# Altium PCB EE209_PCB.PcbDoc
Units mm, origin at the board's own origin, x right, y up, seen from the top; angles counter-clockwise.
Board outline 128.78 x 111.25 mm, 2 copper layers (Top Layer, Bottom Layer); 43 components, 38 nets, 164 pads, 0 vias.
Unrouted connection lines stored in the file: 29.
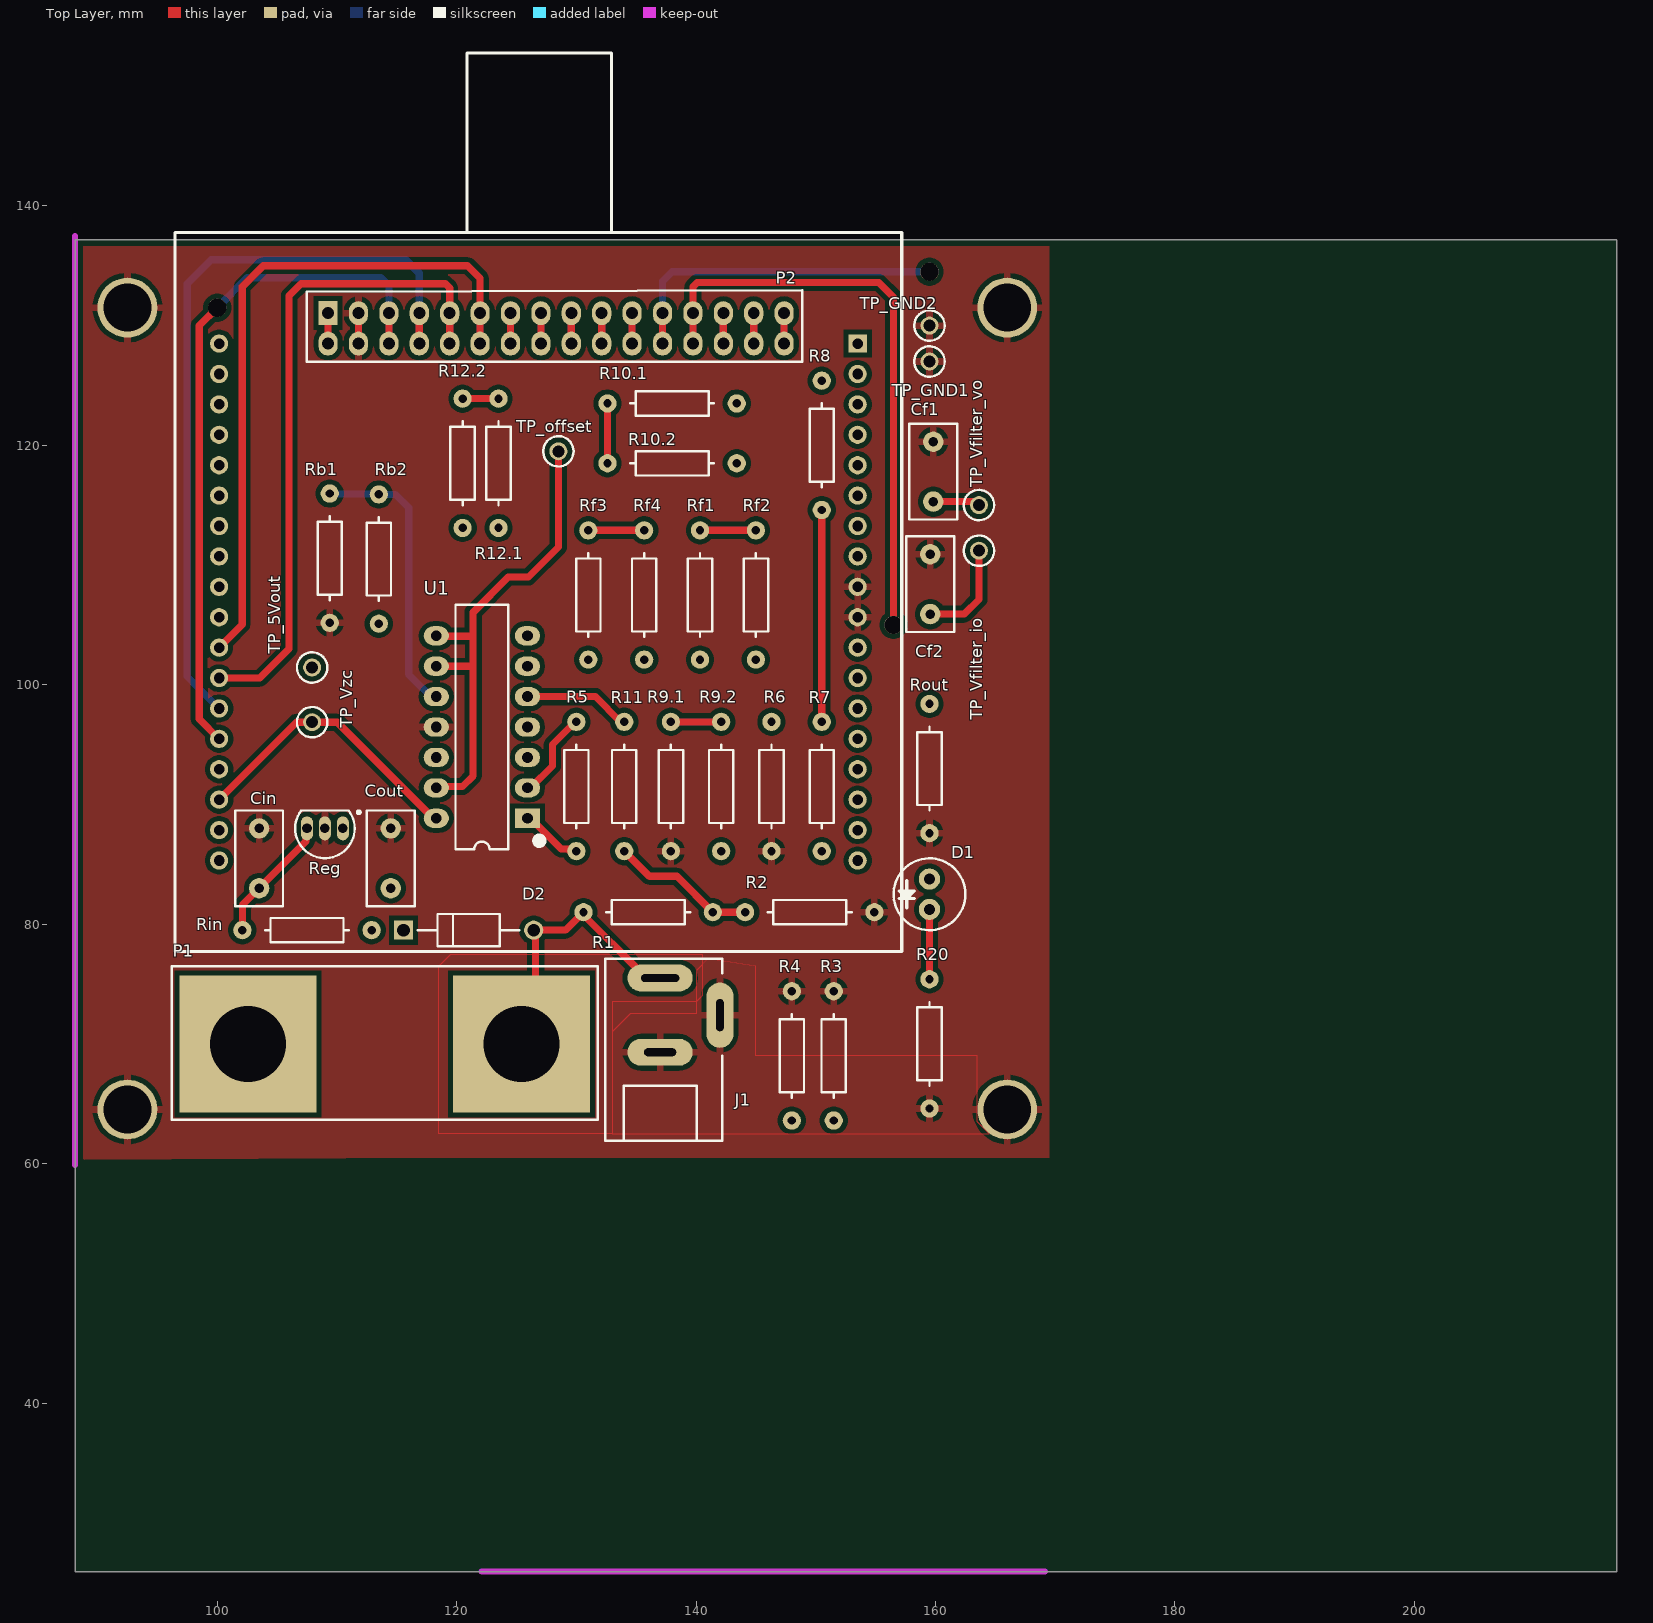
[diagram p0: Top Layer view]
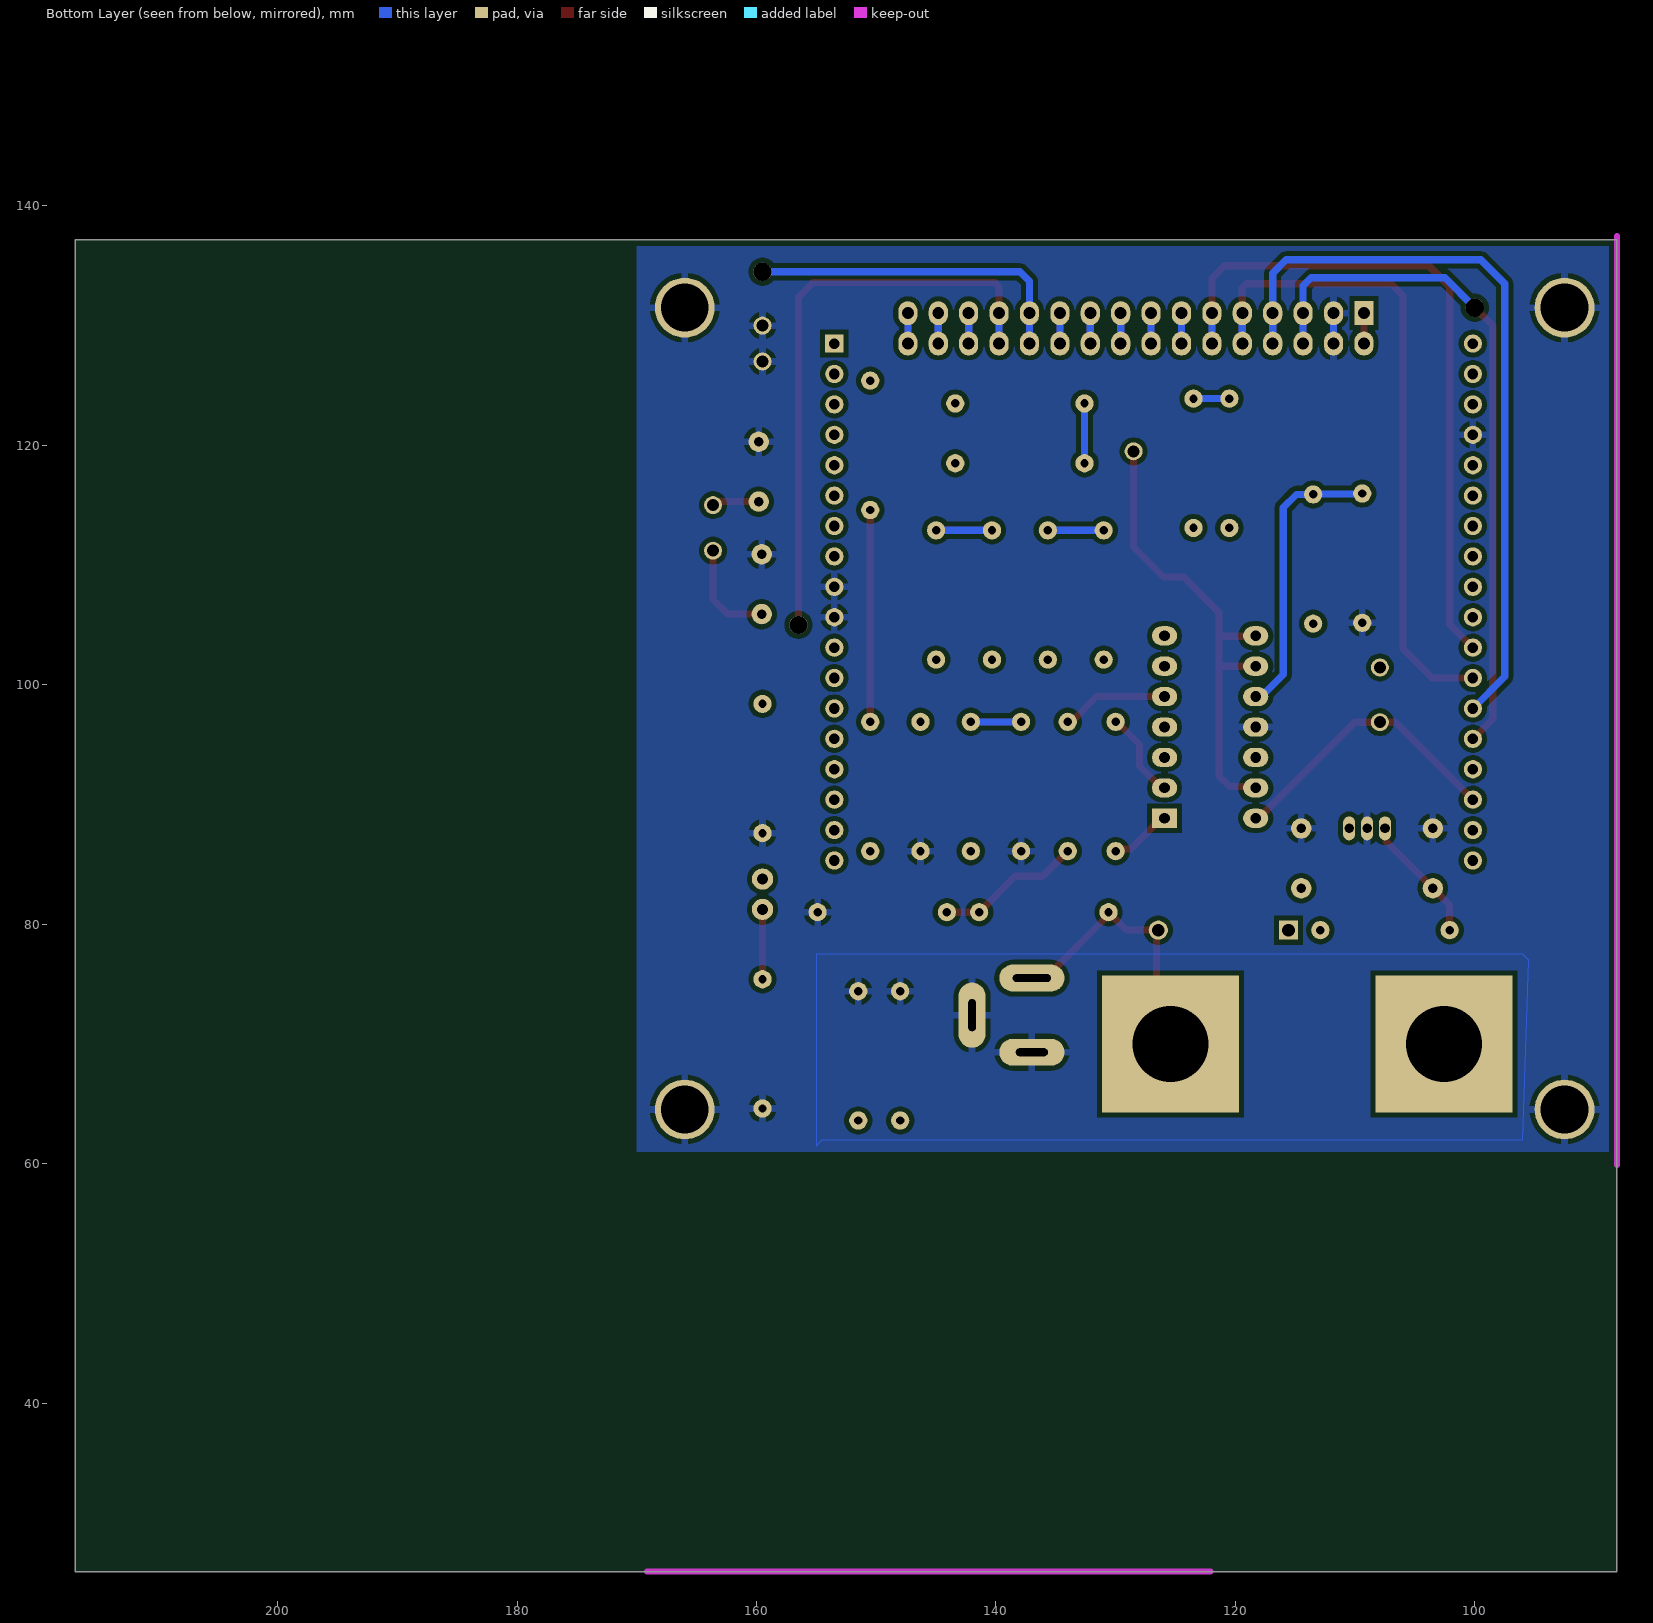
[diagram p1: Bottom Layer view, seen from below]
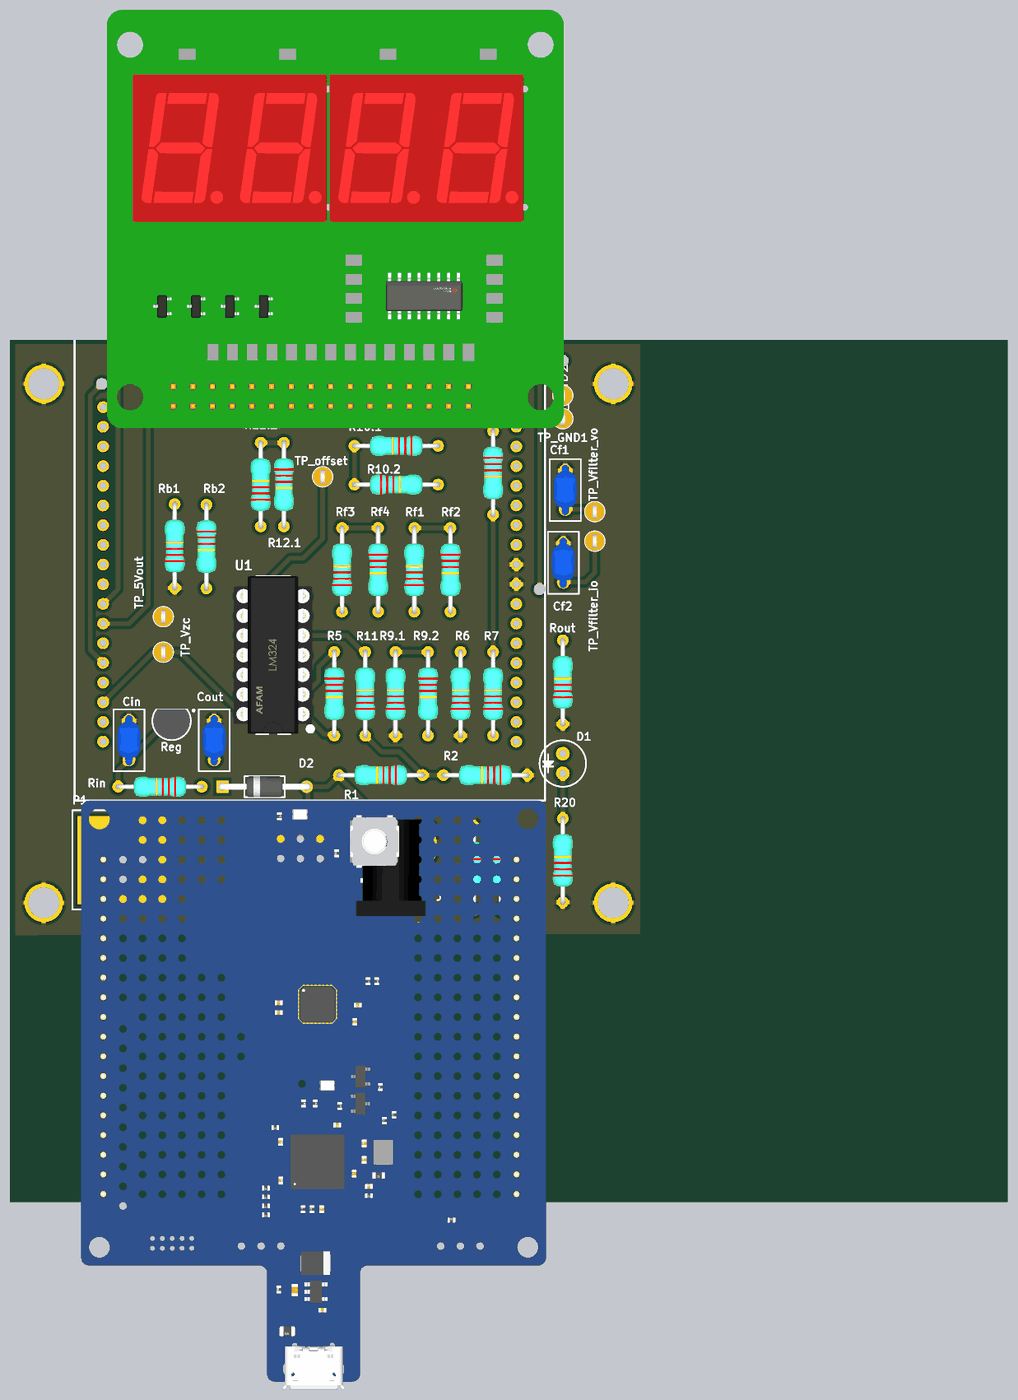
[diagram p2: 3D render of the assembled board from above, using the file's embedded part models]

## Layer stack, top to bottom
Top Solder: solder mask 0.0102, Solder Resist, Dk 3.5
Top Layer: signal copper 0.0356
Dielectric 1: dielectric 0.32, FR-4, Dk 4.8
Bottom Layer: signal copper 0.0356
Bottom Solder: solder mask 0.0102, Solder Resist, Dk 3.5

## Board outline
88.138,25.908 88.138,137.16 216.916,137.16 216.916,25.908

## Design rules (kind name [scope] priority, off if disabled: settings)
BoardOutlineClearance [All] p1: gap=0.5 ignorepadtopadclearanceinfootprint=FALSE
Clearance [All] p1: gap=0.4 ignorepadtopadclearanceinfootprint=FALSE
Height [All] p1: minheight=0 maxheight=20 prefheight=12.7
HoleSize [All] p1: absolutevalues=TRUE maxlimit=10 minlimit=0.4 maxpercent=80.000 minpercent=20.000
MinimumAnnularRing [All] p1: minimumring=0.076
MinimumSolderMaskSliver [All] p1: minsoldermaskwidth=0.1
PlaneConnect [All] p1: planeconnectstyle=Relief reliefexpansion=0.6 reliefentries=4 reliefconductorwidth=0.6 reliefairgap=0.4
PolygonConnect PolygonConnect_1 [All] p1: connectstyle=Relief reliefconductorwidth=0.6 reliefentries=4 polygonreliefangle="90 Angle" airgapwidth=0.4
RoomDefinition EE209_Schematic [InComponentClass('EE209_Schematic')] p1: confinementstyle=ConfineIn formatcopy=TRUE lockcomponents=FALSE outline 170.18,27.686 439.42,27.686 439.42,106.934 170.18,106.934
RoutingVias [All] p1: holewidth=0.6 width=1 viastyle="Through Hole" minholewidth=0.5 minwidth=0.8 maxholewidth=1 maxwidth=2
SMDToCorner [All] p1: distance=157480
SilkToSilkClearance [All] p1: silktosilkclearance=0.1
SilkToSolderMaskClearance [IsPad] p1: minsilkscreentomaskgap=0.1 clearancetoexposedcopper=TRUE
SolderMaskExpansion [All] p1: expansion=0.102 istentingtop=FALSE
Width [All] p1: maxlimit=10 minlimit=0.4 preferedwidth=0.6
24 further rules are at their usual default settings.

## Classes and differential pairs
component class EE209_Schematic: Cf2 Cin1 Cout1 D2 J1 P1 R1 R5 R7 R9 R10 R11 R12 R13 R14 R15 R16 Rb1 Rb2 Reg1 Rf3 Rf4 Rin1 Rout1 TP_1 TP_GND1 TP_GND2 TP_offset1 TP_Vfilter_io1 TP_Vzc1 U1

## Components (designator, comment, footprint, x,y, rotation, side; value= is the part's Value field where it differs from the comment)
Cf1 "1n" CCAP-5P0 159.822,117.802 r90 top
Cf2 "1n" CCAP-5P0 159.568,108.404 r90 top
Cin "47micro" CCAP-5P0 103.5,85.5 r90 top
Cout "10micro" CCAP-5P0 114.5,85.5 r90 top
D1 "Green" LED 159.5,82.5 r270 top
D2 "1N4007" 1N4007-MFG 121,79.5 r0 top
J1 "DC barrel jack" AC-Socket 137,69.5 r90 top value=socket
P1 "Dual Banana Plugs" "Dual Banana Plug" 114,70 r180 top
P2 "Display" Display 127.04,129.77 r180 top
R1 "22k" AXIAL-0.4#1 136,81 r180 top value=100k
R2 "1k" AXIAL-0.4#1 149.5,81 r180 top value=1k2
R3 "1" AXIAL-0.4#1 151.5,69 r270 top
R4 "1" AXIAL-0.4#1 148,69 r270 top
R5 "2.2k" AXIAL-0.4#2 130,91.5 r270 top value=100k
R6 "1k" AXIAL-0.4#1 146.3,91.5 r90 top value=10k
R7 "1k" AXIAL-0.4#1 150.5,91.5 r90 top value=10k
R8 "2.2k" AXIAL-0.4#1 150.5,120 r270 top value=100k
R9.1 "2.7k" AXIAL-0.4#1 137.9,91.5 r90 top
R9.2 "10k" AXIAL-0.4#1 142.1,91.5 r270 top
R10.1 "12k" AXIAL-0.4#1 138,123.5 r180 top value=100k
R10.2 "2.2k" AXIAL-0.4#1 138,118.5 r0 top
R11 "12k" AXIAL-0.4#1 134,91.5 r90 top value=10k
R12.1 "12k" AXIAL-0.4#1 123.5,118.5 r270 top value=100k
R12.2 "2.2k" AXIAL-0.4#1 120.5,118.5 r90 top
R20 "*" AXIAL-0.4#1 159.5,70 r90 top
Rb1 "3.3k" AXIAL-0.4#1 109.402,110.572 r90 top
Rb2 "4.7k" AXIAL-0.4#3 113.5,110.5 r270 top
Reg "L78L05ACZ" TO-92 109,88 r90 top (schematic designator regulator)
Rf1 "1k" AXIAL-0.4#1 140.333,107.5 r90 top
Rf2 "15k" AXIAL-0.4#1 145,107.5 r270 top
Rf3 "1k" AXIAL-0.4#1 131,107.5 r90 top
Rf4 "15k" AXIAL-0.4#1 135.667,107.5 r270 top
Rin "33" AXIAL-0.4#1 107.5,79.5 r180 top
Rout "100" AXIAL-0.4#3 159.5,93 r90 top
TP_5Vout "5003" TP_TH 107.928,101.444 r90 top
TP_GND1 "5003" TP_TH 159.5,127 r90 top
TP_GND2 "5003" TP_TH 159.5,130 r90 top
TP_offset "5003" TP_TH 128.5,119.5 r90 top
TP_Vfilter_io "5003" TP_TH 163.632,111.198 r270 top
TP_Vfilter_vo "5003" TP_TH 163.632,115.008 r90 top
TP_Vzc "5003" TP_TH 107.928,96.872 r90 top
U1 "LM324" DIP-14 122.11,96.468 r180 top
U5 "ATmega328PB Xplained Mini Header" "ATmeg328P Xplained" 126.83,106.91 r180 top locked

## Footprints (in the part's own frame and the unit in brackets; to place one, negate y for a bottom-side part, rotate by r counter-clockwise, add the part's x,y. Pads: shape width x height; smd on the part's side, far side on the other; paste and mask are expansions set on the pad)
1N4007-MFG [mm]
  round 1.6 hole 1.05 paste-1000 mask+0: 1(5.438,0)
  rect 1.6x1.6 hole 1.05 paste-1000 mask+0: 2(-5.438,0)
  silkscreen extent -4.24,-1.35 4.24,1.35, body extent -6.34,-1.45 6.34,1.45, height 0.25
AC-Socket [mm]
  oval 2.25x5.45 hole 0.635 slot 3.175 at 90 deg: 1(6,0)
  oval 5.45x2.25 hole 0.635 slot 2.667 at 0 deg: 2(2.9,-5)
  oval 2.25x5.45 hole 0.635 slot 2.667 at 90 deg: 3(-0.2,0)
  silkscreen extent -7.6,-5.2 7.6,4.6, body extent -6.7,-5 6,4.2, height 10.5
"ATmeg328P Xplained" [mil]
  rect 60x60 hole 35: 1(-1050,-850)
  round 60 hole 35: 1(-1050,350) 2(-1050,-750) 3(-1050,-650) 4(-1050,-550) 5(-1050,-450) 6(-1050,-350) 7(-1050,-250) 8(-1050,-150) 9(-1050,-50) 10(-1050,50) 11(-1050,150) 12(-1050,250) 13(-1050,550) 14(-1050,450) 16(-1050,650) 17(-1050,750) 18(-1050,850) 19(1050,850) 20(1050,750) 21(1050,650) 22(1050,550) 23(1050,450) 24(1050,350) 25(1050,250) 26(1050,150) 27(1050,50) 28(1050,-50) 29(1050,-150) 30(1050,-250) 31(1050,-350) 32(1050,-450) 33(1050,-550) 34(1050,-650) 35(1050,-750) 36(1050,-850)
  silkscreen extent -1195,-1805 1195,1150, body extent -1201,1150 1161,4145, height 452
AXIAL-0.4#1 [mm]
  round 1.524 hole 0.7: 1(-5.4,0) 2(5.4,0)
  silkscreen extent -3.5,-1.02 3.5,1.02, body extent -5.7,-1.3 5.7,1.3, height 2.7
AXIAL-0.4#2 [mm]
  round 1.524 hole 0.7: 1(5.4,0) 2(-5.4,0)
  silkscreen extent -3.5,-1.02 3.5,1.02, body extent -5.7,-1.3 5.7,1.3, height 2.7
AXIAL-0.4#3 [mm]
  round 1.524 hole 0.7: 1(-5.4,0) 1(5.4,0)
  silkscreen extent -3.5,-1.02 3.5,1.02, body extent -5.7,-1.3 5.7,1.3, height 2.7
CCAP-5P0 [mm]
  round 1.7 hole 0.8: 1(-2.5,0) 2(2.5,0)
  silkscreen extent -4,-2 4,2, body extent -3.25,-1.5 3.25,1.5, height 6.5
DIP-14 [mm] "DIP; 14 Leads; Row Spacing 7.62 mm; Pitch 2.54 mm"
  rect 2.1x1.6 hole 0.9: 1(-3.81,7.62)
  oval 2.1x1.6 hole 0.9: 1(-3.81,0) 2(-3.81,5.08) 2(-3.81,-2.54) 3(-3.81,2.54) 6(-3.81,-5.08) 7(-3.81,-7.62) 8(3.81,-7.62) 9(3.81,-5.08) 10(3.81,-2.54) 11(3.81,0) 12(3.81,2.54) 13(3.81,5.08) 14(3.81,7.62)
  silkscreen extent -5.1,-10.2 2.2,10.2, body extent -5.07,-10.2 5.09,10.12, height 9.47
Display [mm]
  oval 1.6x2 hole 1: 1(-20.32,1.27) 1(17.78,1.27) 3(15.24,-1.27) 4(15.24,1.27) 5(12.7,-1.27) 6(12.7,1.27) 7(10.16,-1.27) 8(10.16,1.27) 9(7.62,-1.27) 10(7.62,1.27) 11(5.08,-1.27) 12(5.08,1.27) 13(2.54,-1.27) 14(2.54,1.27) 15(0,-1.27) 16(0,1.27) 17(-2.54,-1.27) 18(-2.54,1.27) 19(-5.08,-1.27) 20(-5.08,1.27) 21(-7.62,-1.27) 22(-7.62,1.27) 23(-10.16,-1.27) 24(-10.16,1.27) 25(-12.7,-1.27) 26(-12.7,1.27) 27(-15.24,-1.27) 28(-15.24,1.27) 29(-17.78,-1.27) 30(-17.78,1.27) 31(-20.32,-1.27)
  rect 1.6x2 hole 1: 1(17.78,-1.27)
  silkscreen extent -21.84,-3.18 19.56,2.79, body extent -32.6,-50 26.4,4, height 13
"Dual Banana Plug" [mm] "Connector; 2 Position"
  rect 11.43x11.43 hole 6.35: 1(-11.43,0) 2(11.43,0)
  silkscreen extent -17.8,-6.48 17.8,6.35, body extent -17.38,-5.99 17.43,5.99, height 5.5
LED [mil]
  round 70 hole 35.43: 1(-50,0) 2(50,0)
  silkscreen extent -118,-118 118,118, body extent -98,-98 98,98, height 413
TO-92 [mm] "TO, Flat Index; 3 In-Line, Axial Leads; Body Dia. 4.5mm; Leads 0.51 x 0.48 mm (max)"
  oval 2x1 hole 0.8: 1(0,-1.5) 2(0,0) 3(0,1.5)
  silkscreen extent -2.48,-2.96 1.5,2.48, body extent -2.4,-2.4 1.53,2.4, height 6.73
TP_TH [mm] "Test Point, Through Hole, Dia 2.54mm"
  round 1.5 hole 1: 1(0,0)
  silkscreen extent -1.27,-1.27 1.27,1.27, body extent -1.27,-1.27 1.27,1.27, height 4.57

## Part data
Cf1 Cf2 Cin Cout: library part CerCap_TH_5P0, "TH ceramic capacitor with 5mm pitch"
D1: library part LED_TH_2P54, "Typical throughole GaAs LED with 2.54mm pitch", Manufacturer="Generic Components", Class I=Optoelectronic, Class II=LED, Published=8-Jun-2000, Publisher="Altium Limited", Revision="July-2002: Re-released for DXP Platform."
D2: library part 1N4007_TH_4AX0, "1N4007 1000V standard axial diode", Supplier Part Number 1=1N4007RLGOSCT-ND, ComponentLink1Description=https://www.fairchildsemi.com/datasheets/1N/1N914.pdf, ComponentLink1URL=https://www.fairchildsemi.com/datasheets/1N/1N914.pdf, Supplier 1=Digi-Key
J1: library part AC_Input, "DC barrel jack connection to AC source"
P1: library part AC_Output, "Dual banana plugs connection to the AC load", LatestRevisionDate=17-Jul-2002, LatestRevisionNote="Re-released for DXP Platform.", Publisher="Altium Limited"
P2: "16-Pin Header Connecting Display"
R1 R2 R3 R4 R5 R6 R7 R8 R9.1 R9.2 R10.1 R10.2 R11 R12.1 R12.2 R20 Rb1 Rb2 Rf1 Rf2 Rf3 Rf4 Rin Rout: library part Res_TH_0AX4, "Through hole resistor", ComponentLink1Description=http://www.royalohm.com/pdf/product2017/PrecisionMetalMF.pdf, LatestRevisionDate=17-Jul-2002, LatestRevisionNote="Re-released for DXP Platform.", PackageReference=AXIAL-0.4, Published=8-Jun-2000, Publisher="Altium Limited"
Reg: library part L78L05_TH_TO92, "Voltage Regulator 5V", Base Part Number=LM78L05, Current - Output=100mA, Manufacturer="ON Semiconductor", Manufacturer Part Number=LM78L05ACZX, Operating Temperature="-40°C ~ 125°C", Package / Case="TO-226-3, TO-92-3 (TO-226AA) (Formed Leads)", Supplier Device Package=TO-92-3, Supplier Part Number 1=LM78L05ACZXCT-ND, Voltage - Input (Max)=30V, Voltage - Output (Max)=-, Voltage - Output (Min/Fixed)=5V, Category="Integrated Circuits (ICs)", ComponentLink1Description=https://www.fairchildsemi.com/datasheets/MC/MC78L05A.pdf, ComponentLink1URL=https://www.fairchildsemi.com/datasheets/MC/MC78L05A.pdf, Control Features=-, Mounting Type="Through Hole", Output Configuration=Positive, Output Type=Fixed, Packaging="Cut Tape (CT)", Part Status=Active, Pricing 1="1=0.69, 10=0.517, 100=0.3226, 500=0.2207, 1000=0.16976 (NZD)", Protection Features="Over Temperature, Short Circuit", PSRR="80dB (120Hz)", RoHS="RoHS Compliant", Stock 1=7782, Supplier 1=Digi-Key, Voltage Dropout (Max)=-
TP_5Vout TP_GND1 TP_GND2 TP_offset TP_Vfilter_io TP_Vfilter_vo TP_Vzc: library part TestPoint, "Test Point, Orange, 1-Pin THD, RoHS", Forward Current="3 A", Forward Voltage="1.08 V", Max Operating Temperature="150 degC", Max Surge Current="80 A", Min Operating Temperature="-65 degC", Package Quantity=500, Peak Reverse Current="600 uA", ComponentLink1Description="Manufacturer URL", ComponentLink1URL=http://www.keyelco.com/, ComponentLink2Description=Datasheet, ComponentLink2URL=http://keyelco.com/userAssets/file/M65p56.pdf, DatasheetVersion=Jun-15, Diameter="5.3 mm", Height="0.25 inch", Length="9.5 mm", Mount="Through Hole", PackageDescription="1-Pin Through Hole Device, Dia 2.54 mm", PackageReference=5003, Packaging=Bulk, Pins=2, Radiation Hardening=No, REACH SVHC="No SVHC", RoHSCompliant=true, Weight="0.01 lb", Width="0.25 inch"
U1: library part LM324N_TH_DIP16, "IC OPAMP GP 14DIP", Current - Supply=1mA, Manufacturer="ON Semiconductor", Manufacturer Part Number=LM324N, Operating Temperature="0°C ~ 70°C", Package / Case="14-DIP (0.300\", 7.62mm)", Supplier Device Package=14-DIP, Supplier Part Number 1=LM324NFS-ND, Voltage - Supply, Single/Dual (±)="3 V ~ 32 V, ±1.5 V ~ 16 V", Amplifier Type="General Purpose", Base Part Number=LM324, Category="Integrated Circuits (ICs)", ComponentLink1Description=https://www.fairchildsemi.com/datasheets/LM/LM2902.pdf, ComponentLink1URL=https://www.fairchildsemi.com/datasheets/LM/LM2902.pdf, Mounting Type="Through Hole", Output Type=-, Packaging=Tube, Part Status=Active, Pricing 1="1=0.9, 10=0.775, 100=0.5789, 500=0.45482, 1000=0.35145 (NZD)", RoHS="RoHS Compliant", Slew Rate=-, Stock 1=2900, Supplier 1=Digi-Key
U5: library part ATmega328PBXplained_TH, "Dual 18-pin headers connecting to ATmega328PB Xplained Mini", Manufacturer="Microchip Technology", Manufacturer Part Number=ATMEGA328PB-XMINI, Operating System=-, Supplier Part Number 1=ATMEGA328PB-XMINI-ND, Board Type="Evaluation Platform", Category="Development Boards, Kits, Programmers", ComponentLink1Description=http://www.microchip.com/mymicrochip/filehandler.aspx?ddocname=en589665, ComponentLink1URL=http://www.microchip.com/mymicrochip/filehandler.aspx?ddocname=en589665, Contents=Board(s), Core Processor=AVR, For Use With/Related Products=ATmega328P, Mounting Type=Fixed, Part Status=Active, Platform="ATmega328P Xplained Mini", Pricing 1="1=15.11 (NZD)", RoHS="RoHS Compliant", Stock 1=454, Supplier 1=Digi-Key, Type="MCU 8-Bit"

## Free pads (board coordinates)
  round 5 hole 4: 2(92.5,64.52) 2(92.5,131.5) 2(166,64.52) 2(166,131.5)
  round 1.524 hole 1.524: 16(159.5,134.5) 18(156.5,105) 23(100,131.5)

## Nets (pads, with @x,y where several pads share a name; then routed paths per layer and width w, separated by ;. In a path a pad name is that pad's centre, name@x,y a point inside that pad or via, vN(x,y) a via of type N, cw(c..) or ccw(c..) an arc to the next point about the centre after c; other vN are vias at no path point)
2.1V: R8.1 R12.2.1
5Vout: Cout.1 D1.1 P2.1 P2.31 Rb2.1@113.5,105.1 Reg.1 Rout.1@159.5,98.4 TP_5Vout.1 U1.1@125.92,96.468 | length 7.7
  Top Layer w0.6: P2.1@109.26,128.5 P2.1@109.26,131.04 ; Reg.1 Reg.1@110.577,87.923 ; P2.1@147.36,128.5 P2.31
  Bottom Layer w0.6: P2.1@147.36,128.5 P2.31
DS1: P2.5 P2.6 pad.23 U5.23 | length 60.4
  Top Layer w0.6: pad.23 98.5,130 98.5,97.14 U5.23 ; P2.6 P2.5
  Bottom Layer w0.6: pad.23 102.5,134 113.68,134 114.34,133.34 P2.5 P2.6
DS2: P2.7 P2.8 U5.24 | length 65.7
  Top Layer w0.6: P2.8 P2.7
  Bottom Layer w0.6: U5.24 97.5,100.68 97.5,133.5 99.5,135.5 115.76,135.5 116.88,134.38 P2.7 P2.8
DS3: P2.9 P2.10 U5.25 | length 57.5
  Top Layer w0.6: U5.25 103.56,100.56 106,103 106,132.5 107,133.5 119.069,133.5 119.42,133.149 P2.9 P2.10
  Bottom Layer w0.6: P2.10 P2.9
DS4: P2.11 P2.12 U5.26 | length 60
  Top Layer w0.6: U5.26 102.094,105.034 102.094,133.243 103.851,135 120.92,135 121.96,133.96 P2.11 P2.12
  Bottom Layer w0.6: P2.12 P2.11
GND: Cf1.2 Cf2.2 Cin.2 Cout.2 J1.2 J1.3 P2.3 P2.4 pad.2 R2.1 R3.1 R4.1 R6.1 R9.1.1 R20.1 Rb1.1 Reg.2 Rout.1@159.5,87.6 TP_GND1.1 TP_GND2.1 U1.11 U5.9 U5.10 U5.33 | length 5.1
  Top Layer w0.6: P2.4 P2.3
  Bottom Layer w0.6: P2.4 P2.3
INT_VS: TP_Vzc.1 U1.14 U5.21 | length 24.1
  Top Layer w0.6: U5.21 106.632,96.872 TP_Vzc.1 110.026,96.872 118.05,88.848 U1.14
LED1: P2.13 P2.14 | length 5.1
  Top Layer w0.6: P2.14 P2.13
  Bottom Layer w0.6: P2.14 P2.13
LED2: P2.15 P2.16 | length 5.1
  Top Layer w0.6: P2.16 P2.15
  Bottom Layer w0.6: P2.16 P2.15
LED3: P2.17 P2.18 | length 5.1
  Top Layer w0.6: P2.18 P2.17
  Bottom Layer w0.6: P2.18 P2.17
LED4: P2.19 P2.20 | length 5.1
  Top Layer w0.6: P2.20 P2.19
  Bottom Layer w0.6: P2.20 P2.19
NetCin_1: Cin.1 Reg.3 Rin.2 | length 10.7
  Top Layer w0.6: Rin.2 102.1,81.6 Cin.1 107.423,86.923 107.423,87.923 Reg.3
NetD1_2: D1.2 R20.2 | length 5.8
  Top Layer w0.6: R20.2 D1.2
NetD2_2: D2.2 Rin.1
NetR5_1: R5.2 R6.2 U1.2@125.92,91.388 | length 7.4
  Top Layer w0.6: U1.2@125.92,91.388 126.17,91.388 128,93.218 128,95 129.9,96.9 R5.2
NetR7_2: R7.2 R8.2 U1.3 | length 17.7
  Top Layer w0.6: R7.2 R8.2
NetR9.1_2: R9.1.2 R9.2.1 | length 8.4
  Top Layer w0.6: R9.1.2 R9.2.1
  Bottom Layer w0.6: R9.1.2 R9.2.1
NetR9.2_2: R9.2.2 R10.1.1 U1.6
NetR10.1_2: R10.1.2 R10.2.1 | length 10
  Top Layer w0.6: R10.2.1 R10.1.2
  Bottom Layer w0.6: R10.2.1 R10.1.2
NetR11_2: R11.2 R12.1.2 U1.2@125.92,99.008 | length 8.7
  Top Layer w0.6: U1.2@125.92,99.008 131.592,99.008 R11.2@133.7,96.9
NetR12.1_1: R12.1.1 R12.2.2 | length 6
  Top Layer w0.6: R12.2.2 R12.1.1
  Bottom Layer w0.6: R12.2.2 R12.1.1
NetRb1_2: Rb1.2 Rb2.1@113.5,115.9 U1.10 | length 24.1
  Bottom Layer w0.6: Rb1.2 109.438,115.936 113.464,115.936 113.5,115.9 114.9,115.9 116,114.8 116,100.851 117.843,99.008 U1.10
NetRf1_2: Rf1.2 Rf2.1 | length 9.3
  Top Layer w0.6: Rf1.2 Rf2.1
  Bottom Layer w0.6: Rf1.2 Rf2.1
NetRf3_2: Rf3.2 Rf4.1 | length 9.3
  Top Layer w0.6: Rf3.2 Rf4.1
  Bottom Layer w0.6: Rf3.2 Rf4.1
OE: P2.27 P2.28 | length 5.1
  Top Layer w0.6: P2.28 P2.27
  Bottom Layer w0.6: P2.28 P2.27
SH_CP: P2.23 P2.24 pad.16 U5.16 | length 30.4
  Top Layer w0.6: P2.24 P2.23
  Bottom Layer w0.6: P2.24 P2.23 137.2,133.7 138,134.5 pad.16
SH_DH: P2.29 P2.30 | length 5.1
  Top Layer w0.6: P2.30 P2.29
  Bottom Layer w0.6: P2.30 P2.29
SH_ST: P2.25 P2.26 pad.18 U5.18 | length 51.8
  Top Layer w0.6: P2.26 P2.25 139.74,133.149 ; 139.748,133.248 140.099,133.599 155.268,133.599 156.5,132.367 pad.18@156.5,105.208
  Bottom Layer w0.6: P2.26 P2.25
SRCLR: P2.21 P2.22 | length 5.1
  Top Layer w0.6: P2.22 P2.21
  Bottom Layer w0.6: P2.22 P2.21
Vac: D2.1 J1.1 P1.1 R1.2 | length 23.3
  Top Layer w0.6: P1.1 126.598,71.168 D2.1@126.598,79.5 ; D2.1 D2.1@126.598,79.5 ; J1.1@136.582,76.148 135.217,76.148 130.6,80.765 R1.2 129.1,79.5 D2.1@126.598,79.5
  Top Layer w1: P1.1@124.16,73.81 P1.1@124.414,73.556
Vfilter_io: Cf2.1 Rf4.2 TP_Vfilter_io.1 U5.14 | length 8.6
  Top Layer w0.6: Cf2.1 162.404,105.904 163.632,107.132 TP_Vfilter_io.1
Vfilter_vo: Cf1.1 Rf2.2 TP_Vfilter_vo.1 U1.12 U5.1@153.5,98.02 | length 3.9
  Top Layer w0.6: Cf1.1 163.094,115.302 163.388,115.008 TP_Vfilter_vo.1
Vio: R5.1 Rf3.1 U1.1@125.92,88.848 | length 4.7
  Top Layer w0.6: U1.1@125.92,88.848 126.17,88.848 128.741,86.277 129.323,86.277 R5.1@129.5,86.1
Vis: P1.2 R3.2 R4.2 R7.1
Vshift: TP_offset.1 U1.8 U1.9 U1.13 U5.13 | length 40.7
  Top Layer w0.6: U1.13 118.412,91.5 120.5,91.5 121.38,92.38 121.38,101.548 ; U1.9 121.38,101.548 ; U1.8 118.337,104.051 118.51,104.051 121.38,104.051 ; TP_offset.1 128.5,111.5 126,109 124.317,109 121.38,106.063 121.38,104.051 ; 121.38,101.548 121.38,104.051
Vvo: R10.2.2 Rf1.1 U1.7
Vvs: R1.1 R2.2 R11.1 | length 12.2
  Top Layer w0.6: R11.1 136.1,84 138.4,84 R1.1 R2.2
pads on no net: U5.1@153.5,128.5 U5.2 U5.3 U5.4 U5.5 U5.6 U5.7 U5.8 U5.11 U5.12 U5.17 U5.19 U5.20 U5.22 U5.27 U5.28 U5.29 U5.30 U5.31 U5.32 U5.34 U5.35 U5.36

## Polygon pours and split planes (outlines as drawn)
GND on Bottom Layer "GND_L02_P003" (solid, pour order 3): 88.265,137.16 170,137.16 170,61 88.265,61
Vis on Bottom Layer "VIS_L02_P004" (solid, pour order 4): 95.5,77 96,77.5 155,77.5 155,61.5 154.5,62 96,62
no net on Top Layer "NONET_L01_P006" (solid, pour order 6): 140.981,77.1 140,76.119 140,72.5 134.5,72.5 133,71 133,62.5 164.5,62.5 163.5,63.5 163.5,69 145,69 145,76.5
Vac on Top Layer "VAC_L01_P005" (solid, pour order 5): 118.5,62.5 118.5,76.5 119.5,77.5 140.5,77.5 140.5,74 140,73.5 133,73.5 133,62.5
GND on Top Layer "GND_L01_P002" (solid, pour order 2): 118,60.5 88.138,60.318 88.138,137.16 169.5,137.16 169.5,60.5 148,60.5

## Keep-outs
Keep-Out Layer:
  lines w0.5: 88.138,59.862 88.138,137.5 ; 122.092,25.908 169.164,25.908

## Silkscreen, mask and mechanical layers (free items; w line width, h text height)
Mechanical 1:
  lines w0.254: 88.138,137.16 170,137.16 170,60.5
  lines w0.5: 87.985,136.992 87.985,60.5 88.243,60.5 88.243,60.408 169.664,60.408